# Altium PCB Led Strip 1-3W.PcbDoc
Units mm, origin at the board's own origin, x right, y up, seen from the top; angles counter-clockwise.
Board outline 152.4 x 101.6 mm, 2 copper layers (Top Layer, Bottom Layer); 59 components, 47 nets, 139 pads, 0 vias.
Unrouted connection lines stored in the file: 49.
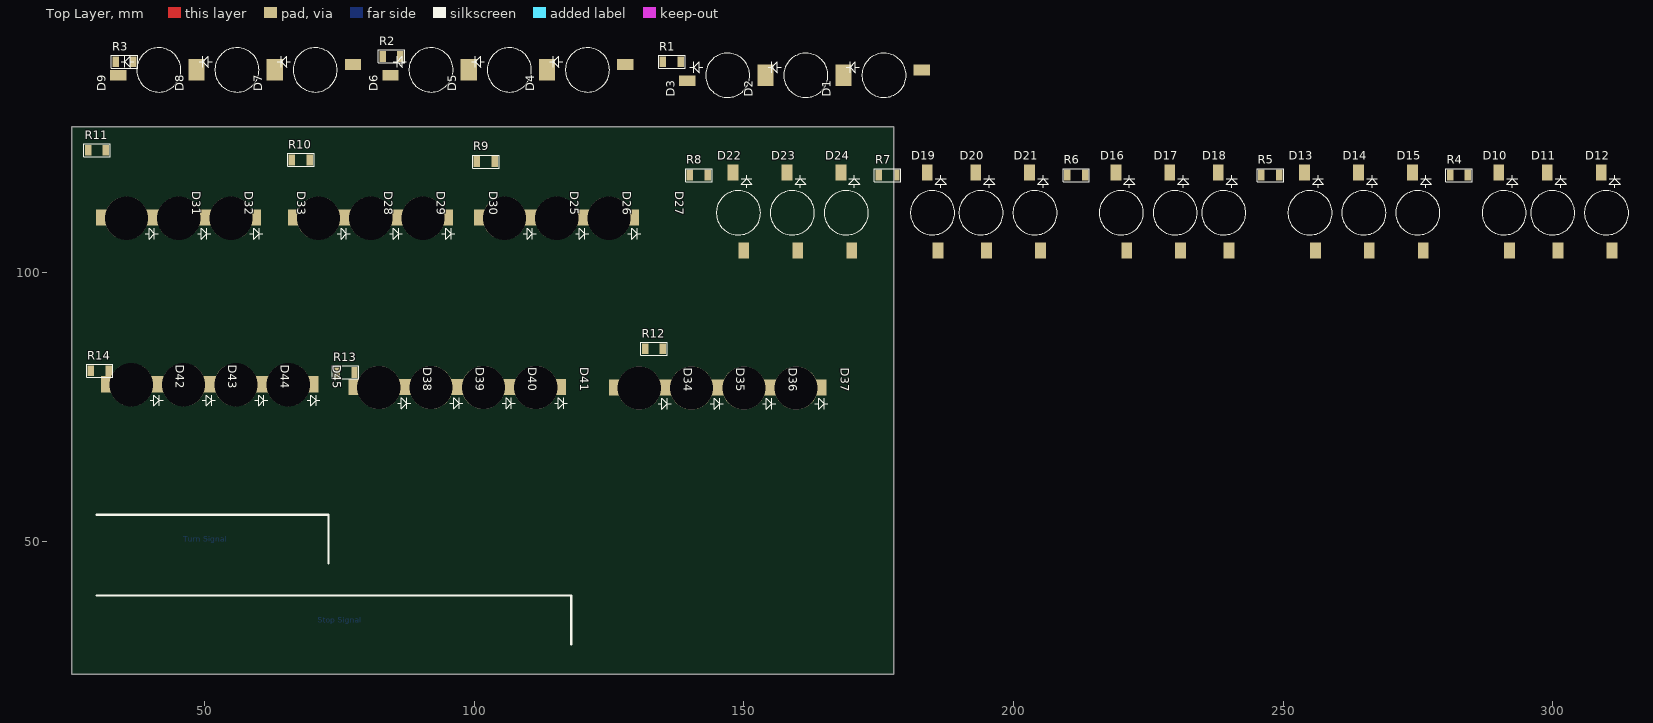
[diagram p0: Top Layer view]
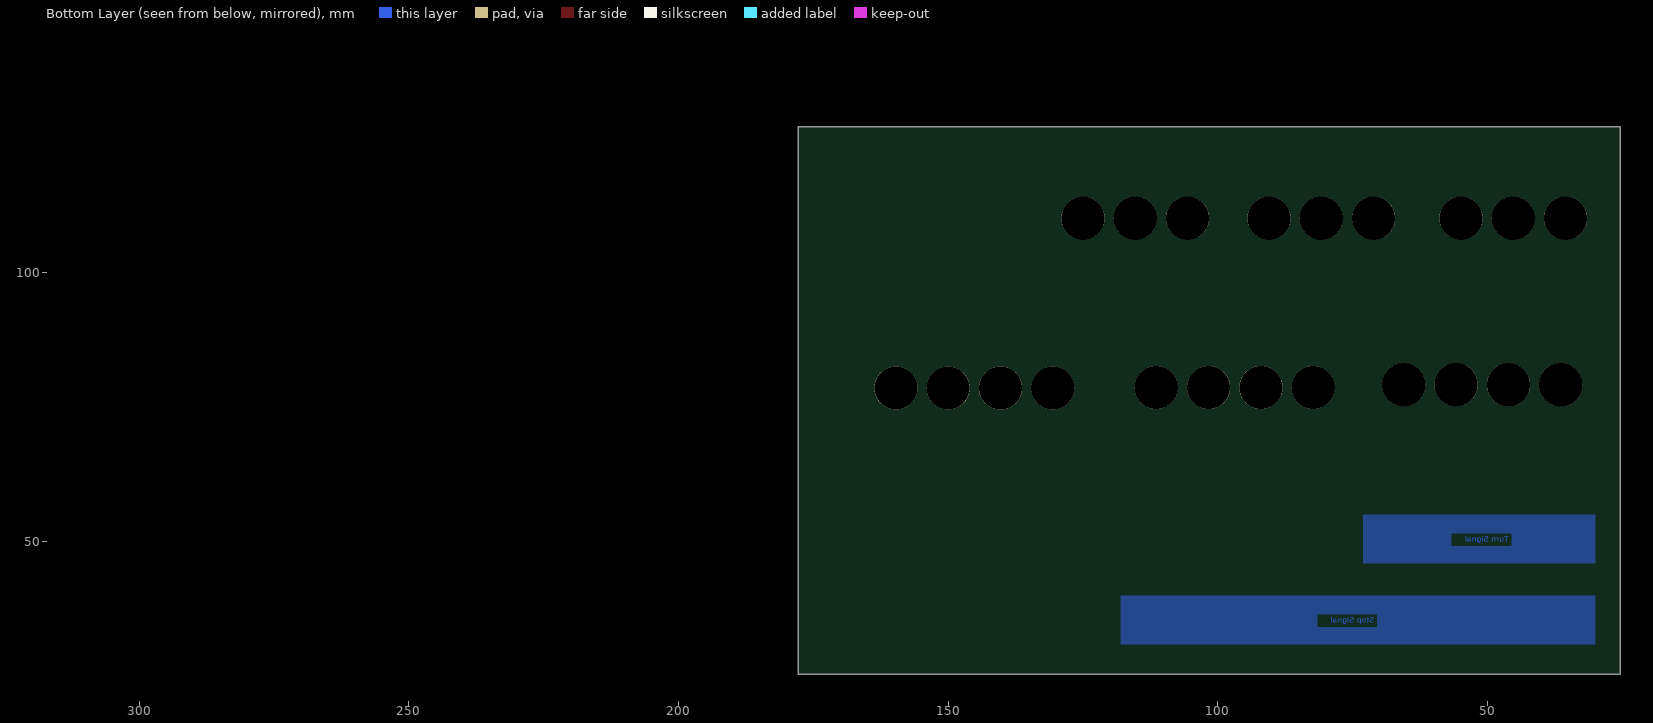
[diagram p1: Bottom Layer view, seen from below]

## Layer stack, top to bottom
Top Solder: solder mask 0.0102, Solder Resist, Dk 3.5
Top Layer: signal copper 0.0356
Dielectric 1: dielectric 0.32, FR-4, Dk 4.8
Bottom Layer: signal copper 0.0356
Bottom Solder: solder mask 0.0102, Solder Resist, Dk 3.5

## Board outline
25.4,25.4 177.8,25.4 177.8,127 25.4,127

## Design rules (kind name [scope] priority, off if disabled: settings)
Clearance [All] p1: gap=0.5
ComponentClearance ComponentClearance_1 [(HasFootprint('LED SMD 1W 3W Compact'))] p1: gap=0 collisioncheckmode=3 verticalgap=0 showdistances=FALSE
ComponentClearance [All] p2: gap=0.254 collisioncheckmode=3 verticalgap=0.254 showdistances=FALSE
PolygonConnect [All] p1: connectstyle=Relief reliefconductorwidth=0.254 reliefentries=4 polygonreliefangle="90 Angle" airgapwidth=0.254
RoutingVias [All] p1: holewidth=0.711 width=1.27 viastyle="Through Hole" minholewidth=0.711 minwidth=1.27 maxholewidth=0.711 maxwidth=1.27
SolderMaskExpansion [All] p1: expansion=0.102
Width [All] p1: maxlimit=2 minlimit=0.5 preferedwidth=0.5
28 further rules are at their usual default settings.

## Components (designator, comment, footprint, x,y, rotation, side; value= is the part's Value field where it differs from the comment)
D1 "" "LED SMD 1W 3W" 183,137.5 r180 top
D2 "" "LED SMD 1W 3W" 168.5,137.5 r180 top
D3 "" "LED SMD 1W 3W" 154,137.5 r180 top
D4 "" "LED SMD 1W 3W" 128,138.5 r180 top
D5 "" "LED SMD 1W 3W" 113.5,138.5 r180 top
D6 "" "LED SMD 1W 3W" 99,138.5 r180 top
D7 "" "LED SMD 1W 3W" 77.5,138.5 r180 top
D8 "" "LED SMD 1W 3W" 63,138.5 r180 top
D9 "" "LED SMD 1W 3W" 48.5,138.5 r180 top
D10 "" "LED SMD 1W 3W" 292,104 r90 top
D11 "" "LED SMD 1W 3W" 301,104 r90 top
D12 "" "LED SMD 1W 3W" 311,104 r90 top
D13 "" "LED SMD 1W 3W" 256,104 r90 top
D14 "" "LED SMD 1W 3W" 266,104 r90 top
D15 "" "LED SMD 1W 3W" 276,104 r90 top
D16 "" "LED SMD 1W 3W" 221,104 r90 top
D17 "" "LED SMD 1W 3W" 231,104 r90 top
D18 "" "LED SMD 1W 3W" 240,104 r90 top
D19 "" "LED SMD 1W 3W" 186,104 r90 top
D20 "" "LED SMD 1W 3W" 195,104 r90 top
D21 "" "LED SMD 1W 3W" 205,104 r90 top
D22 "" "LED SMD 1W 3W" 150,104 r90 top
D23 "" "LED SMD 1W 3W" 160,104 r90 top
D24 "" "LED SMD 1W 3W" 170,104 r90 top
D25 "" "LED SMD 1W 3W Compact" 101,110.1 r0 top
D26 "" "LED SMD 1W 3W Compact" 110.7,110.1 r0 top
D27 "" "LED SMD 1W 3W Compact" 120.4,110.1 r0 top
D28 "" "LED SMD 1W 3W Compact" 66.5,110.1 r0 top
D29 "" "LED SMD 1W 3W Compact" 76.2,110.1 r0 top
D30 "" "LED SMD 1W 3W Compact" 85.9,110.1 r0 top
D31 "" "LED SMD 1W 3W Compact" 30.9,110.1 r0 top
D32 "" "LED SMD 1W 3W Compact" 40.6,110.1 r0 top
D33 "" "LED SMD 1W 3W Compact" 50.3,110.1 r0 top
D34 "" "LED SMD 1W 3W Compact" 126,78.6 r0 top
D35 "" "LED SMD 1W 3W Compact" 135.7,78.6 r0 top
D36 "" "LED SMD 1W 3W Compact" 145.4,78.6 r0 top
D37 "" "LED SMD 1W 3W Compact" 155.1,78.6 r0 top
D38 "" "LED SMD 1W 3W Compact" 77.7,78.7 r0 top
D39 "" "LED SMD 1W 3W Compact" 87.4,78.7 r0 top
D40 "" "LED SMD 1W 3W Compact" 97.1,78.7 r0 top
D41 "" "LED SMD 1W 3W Compact" 106.8,78.7 r0 top
D42 "" "LED SMD 1W 3W Compact" 31.8,79.2 r0 top
D43 "" "LED SMD 1W 3W Compact" 41.5,79.2 r0 top
D44 "" "LED SMD 1W 3W Compact" 51.2,79.2 r0 top
D45 "" "LED SMD 1W 3W Compact" 60.9,79.2 r0 top
R1 "Om" "SMD 1206 (3216)" 135,139 r0 top
R2 "Om" "SMD 1206 (3216)" 83,140 r0 top
R3 "Om" "SMD 1206 (3216)" 33.5,139 r0 top
R4 "Om" "SMD 1206 (3216)" 281,118 r0 top
R5 "Om" "SMD 1206 (3216)" 246,118 r0 top
R6 "Om" "SMD 1206 (3216)" 210,118 r0 top
R7 "Om" "SMD 1206 (3216)" 175,118 r0 top
R8 "Om" "SMD 1206 (3216)" 140,118 r0 top
R9 "Om" "SMD 1206 (3216)" 100.5,120.5 r0 top
R10 "Om" "SMD 1206 (3216)" 66.2,120.8 r0 top
R11 "Om" "SMD 1206 (3216)" 28.4,122.6 r0 top
R12 "Om" "SMD 1206 (3216)" 131.7,85.8 r0 top
R13 "Om" "SMD 1206 (3216)" 74.5,81.4 r0 top
R14 "Om" "SMD 1206 (3216)" 28.9,81.7 r0 top

## Footprints (in the part's own frame and the unit in brackets; to place one, negate y for a bottom-side part, rotate by r counter-clockwise, add the part's x,y. Pads: shape width x height; smd on the part's side, far side on the other; paste and mask are expansions set on the pad)
"LED SMD 1W 3W" [mm]
  rect 3x2 smd: A(0,0) K(14.5,2)
  silkscreen extent 2.9,-3.1 14,5.1, body extent -0.09,-3 14.59,5, height 5.93
"LED SMD 1W 3W Compact" [mm]
  rect 2x3 smd: A(0,0) K(9.2,0)
  round 8 hole 8 unplated mask+0: Hole(4.6,-0.1)
  silkscreen extent 8.1,-4 10.5,-2, body extent -2.54,-4.1 12.14,3.9, height 4.5
"SMD 1206 (3216)" [mm]
  rect 1.2x2 smd: 1(0,0) 2(3.3,0)
  silkscreen extent -0.8,-1.2 4.1,1.2, body extent 0.05,-0.8 3.25,0.8, height 0.55

## Part data
D1 D2 D3 D4 D5 D6 D7 D8 D9 D10 D11 D12 D13 D14 D15 D16 D17 D18 D19 D20 D21 D22 D23 D24 D25 D26 D27 D28 D29 D30 D31 D32 D33 D34 D35 D36 D37 D38 D39 D40 D41 D42 D43 D44 D45: library part "Led 1-3W", "1-3W"
R1 R2 R3 R4 R5 R6 R7 R8 R9 R10 R11 R12 R13 R14: library part "Res SMD 1206"

## Nets (pads, with @x,y where several pads share a name; then routed paths per layer and width w, separated by ;. In a path a pad name is that pad's centre, name@x,y a point inside that pad or via, vN(x,y) a via of type N, cw(c..) or ccw(c..) an arc to the next point about the centre after c; other vN are vias at no path point)
GND: D3.K D6.K D9.K D12.K D15.K D18.K D21.K D24.K D27.K D30.K D33.K D37.K D41.K D45.K
NetD1_A: D1.A R1.2
NetD1_K: D1.K D2.A
NetD2_K: D2.K D3.A
NetD4_A: D4.A R2.2
NetD4_K: D4.K D5.A
NetD5_K: D5.K D6.A
NetD7_A: D7.A R3.2
NetD7_K: D7.K D8.A
NetD8_K: D8.K D9.A
NetD10_A: D10.A R4.2
NetD10_K: D10.K D11.A
NetD11_K: D11.K D12.A
NetD13_A: D13.A R5.2
NetD13_K: D13.K D14.A
NetD14_K: D14.K D15.A
NetD16_A: D16.A R6.2
NetD16_K: D16.K D17.A
NetD17_K: D17.K D18.A
NetD19_A: D19.A R7.2
NetD19_K: D19.K D20.A
NetD20_K: D20.K D21.A
NetD22_A: D22.A R8.2
NetD22_K: D22.K D23.A
NetD23_K: D23.K D24.A
NetD25_A: D25.A R9.2
NetD25_K: D25.K D26.A
NetD26_K: D26.K D27.A
NetD28_A: D28.A R10.2
NetD28_K: D28.K D29.A
NetD29_K: D29.K D30.A
NetD31_A: D31.A R11.2
NetD31_K: D31.K D32.A
NetD32_K: D32.K D33.A
NetD34_A: D34.A R12.2
NetD34_K: D34.K D35.A
NetD35_K: D35.K D36.A
NetD36_K: D36.K D37.A
NetD38_A: D38.A R13.2
NetD38_K: D38.K D39.A
NetD39_K: D39.K D40.A
NetD40_K: D40.K D41.A
NetD42_A: D42.A R14.2
NetD42_K: D42.K D43.A
NetD43_K: D43.K D44.A
NetD44_K: D44.K D45.A
VCC: R1.1 R2.1 R3.1 R4.1 R5.1 R6.1 R7.1 R8.1 R9.1 R10.1 R11.1 R12.1 R13.1 R14.1
pads on no net: D25.Hole D26.Hole D27.Hole D28.Hole D29.Hole D30.Hole D31.Hole D32.Hole D33.Hole D34.Hole D35.Hole D36.Hole D37.Hole D38.Hole D39.Hole D40.Hole D41.Hole D42.Hole D43.Hole D44.Hole D45.Hole

## Polygon pours and split planes (outlines as drawn)
no net on Bottom Layer "Top Layer-No Net" (solid, pour order 8): 30,40 118,40 118,31 30,31
no net on Bottom Layer "Top Layer-No Net" (solid, pour order 6): 30,55 73,55 73,46 30,46

## Other copper
Bottom Layer:
  text "Turn Signal" at 46,50 h1
  text "Stop Signal" at 71,35 h1

## Silkscreen, mask and mechanical layers (free items; w line width, h text height)
Top Overlay:
  lines w0.4: 30,40 118,40 118,31 ; 30,55 73,55 73,46